# Altium PCB PCB1.PcbDoc
Units mil, origin at the board's own origin, x right, y up, seen from the top; angles counter-clockwise.
Board outline 3000.44 x 2100 mil, 4 copper layers (Top Layer, Int1 (GND), Int2 (GND), Bottom Layer), stack 53.912 mil thick; 42 components, 23 nets, 152 pads, 57 vias.
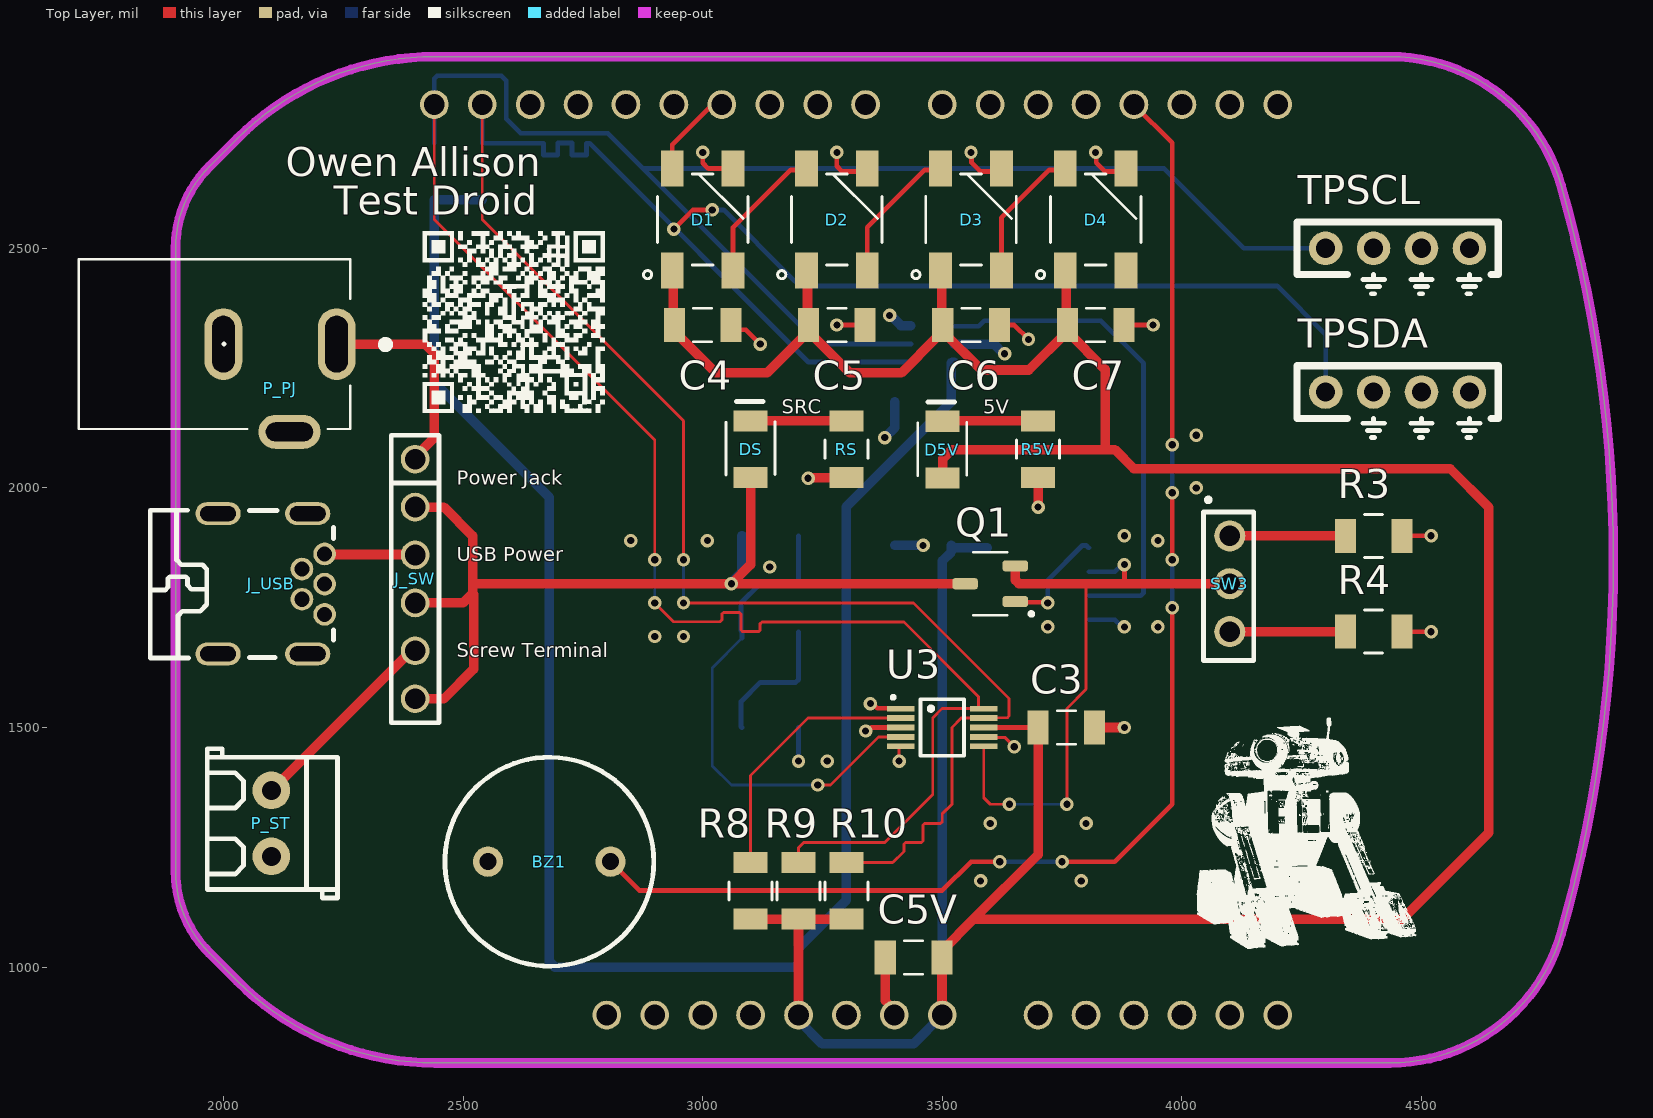
[diagram p0: Top Layer view]
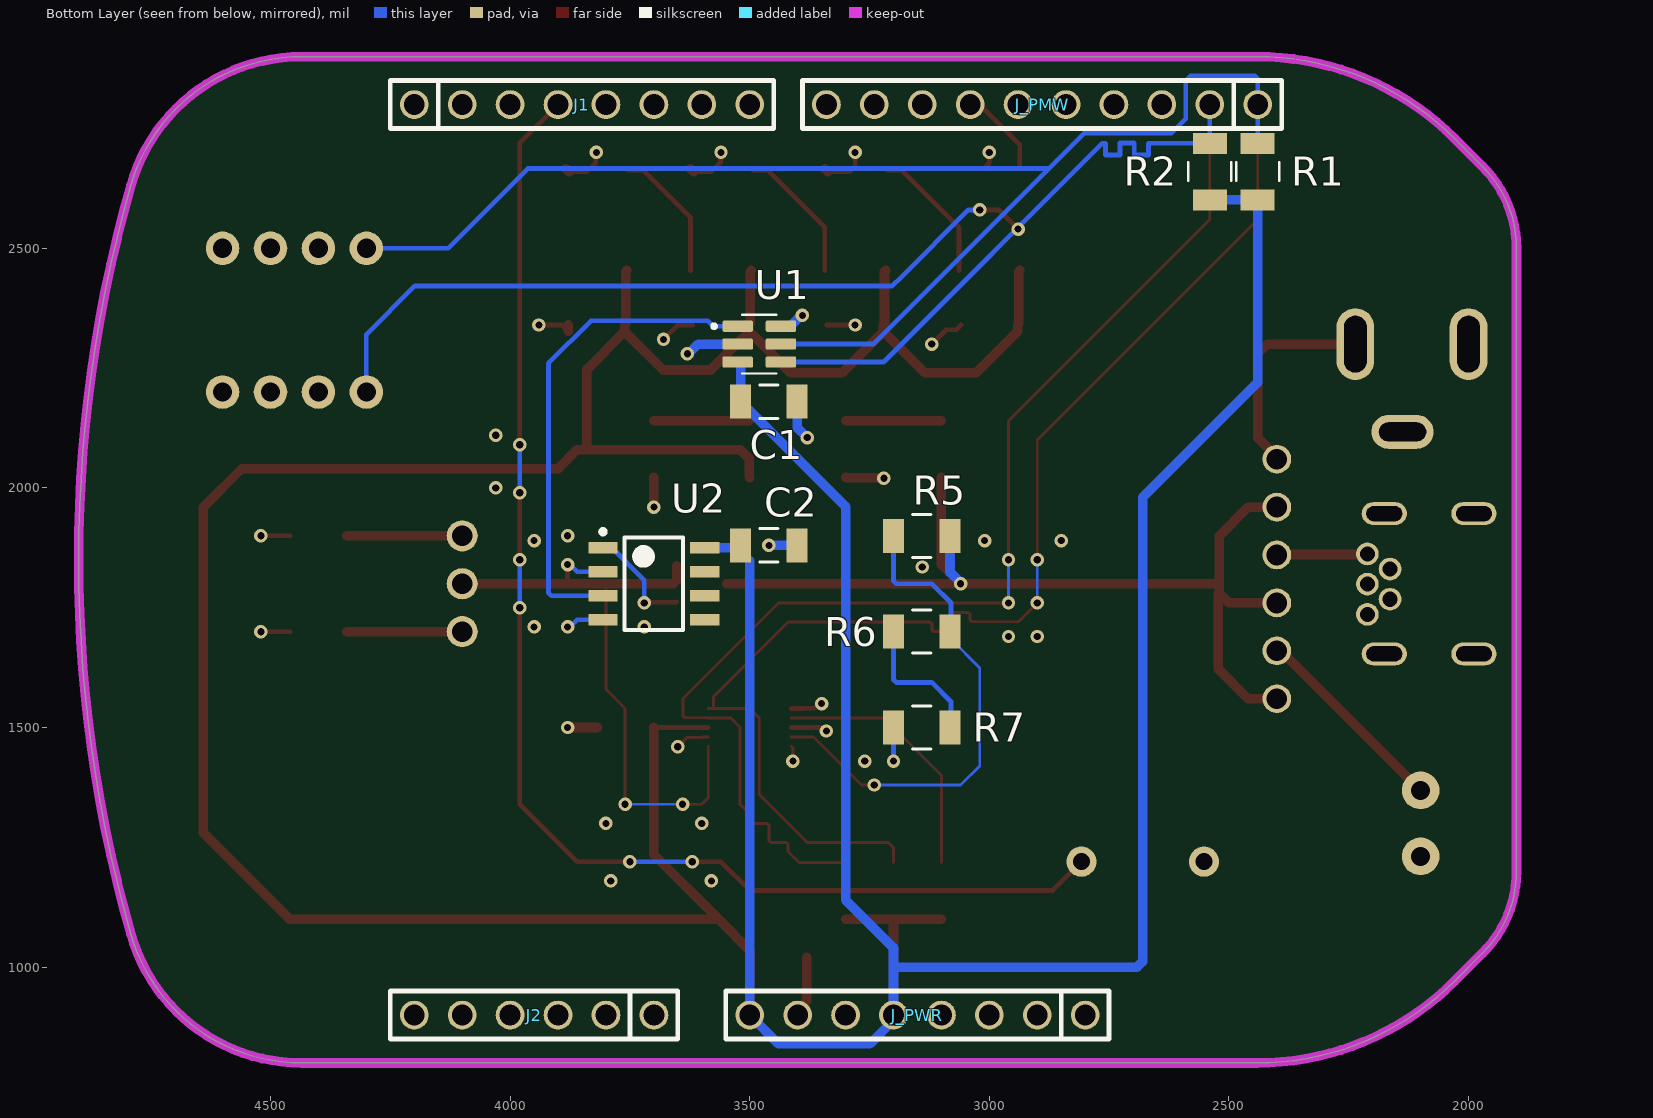
[diagram p1: Bottom Layer view, seen from below]
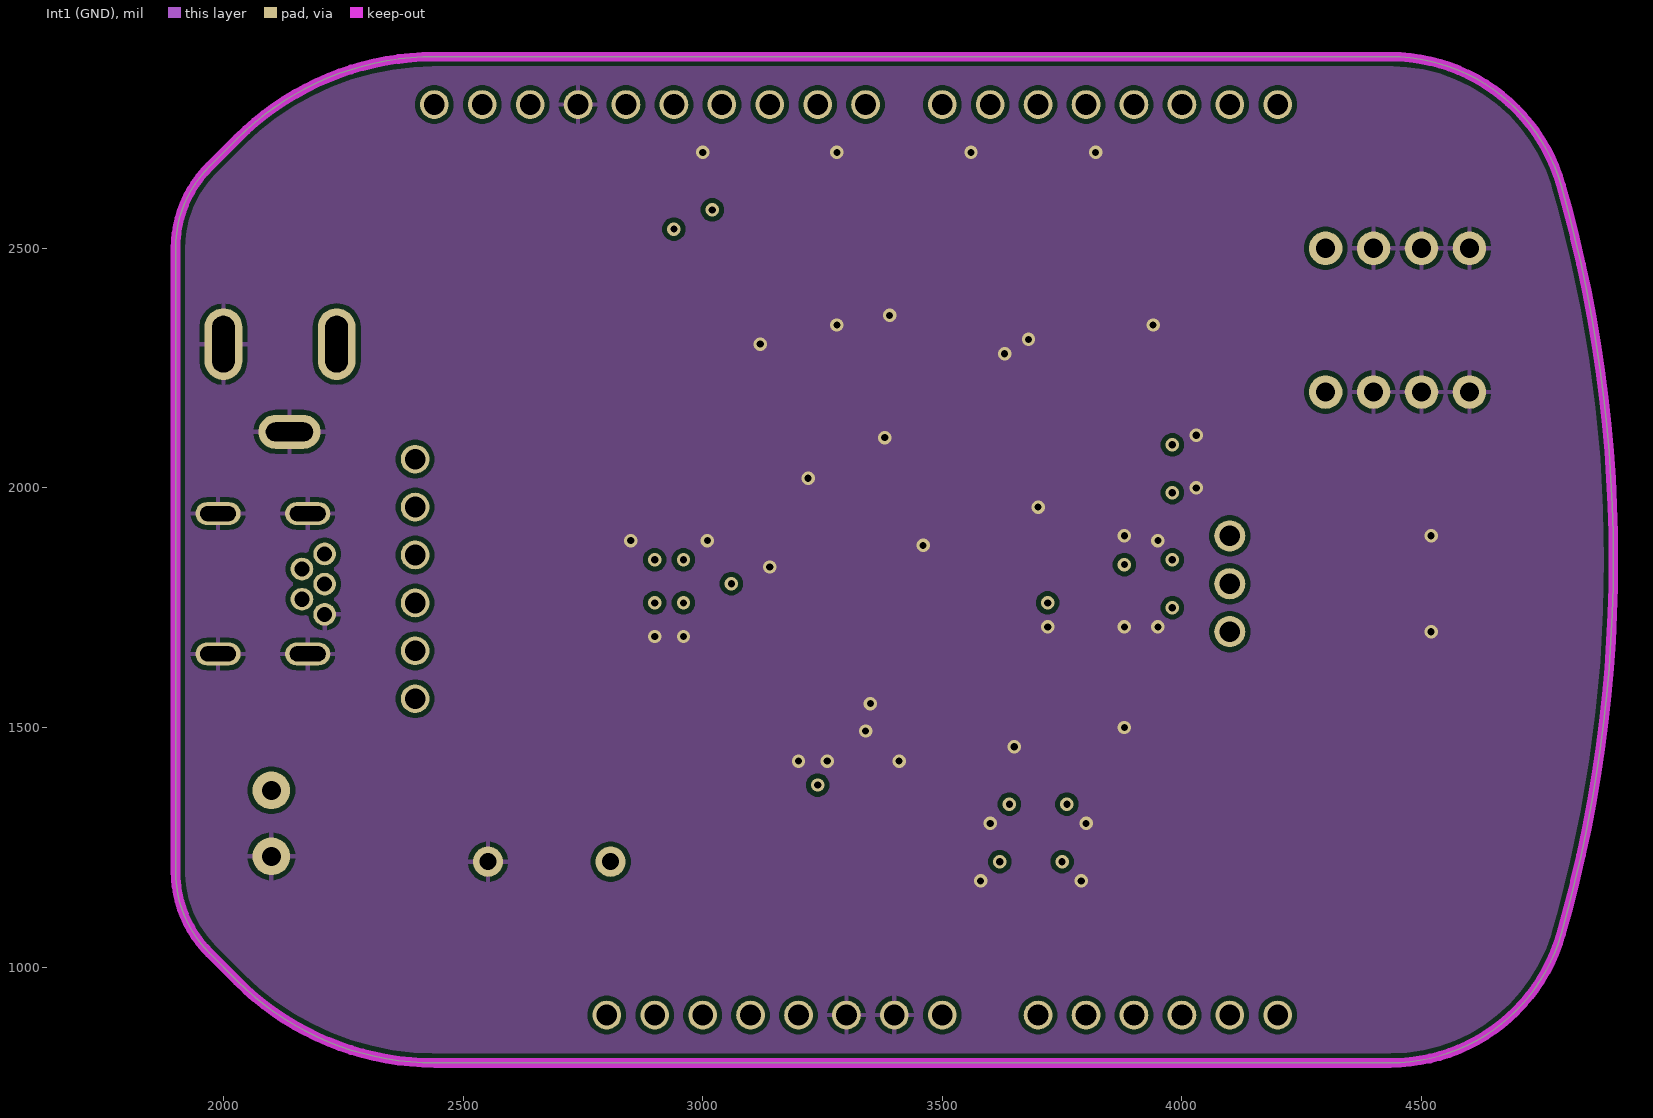
[diagram p2: Int1 (GND)]
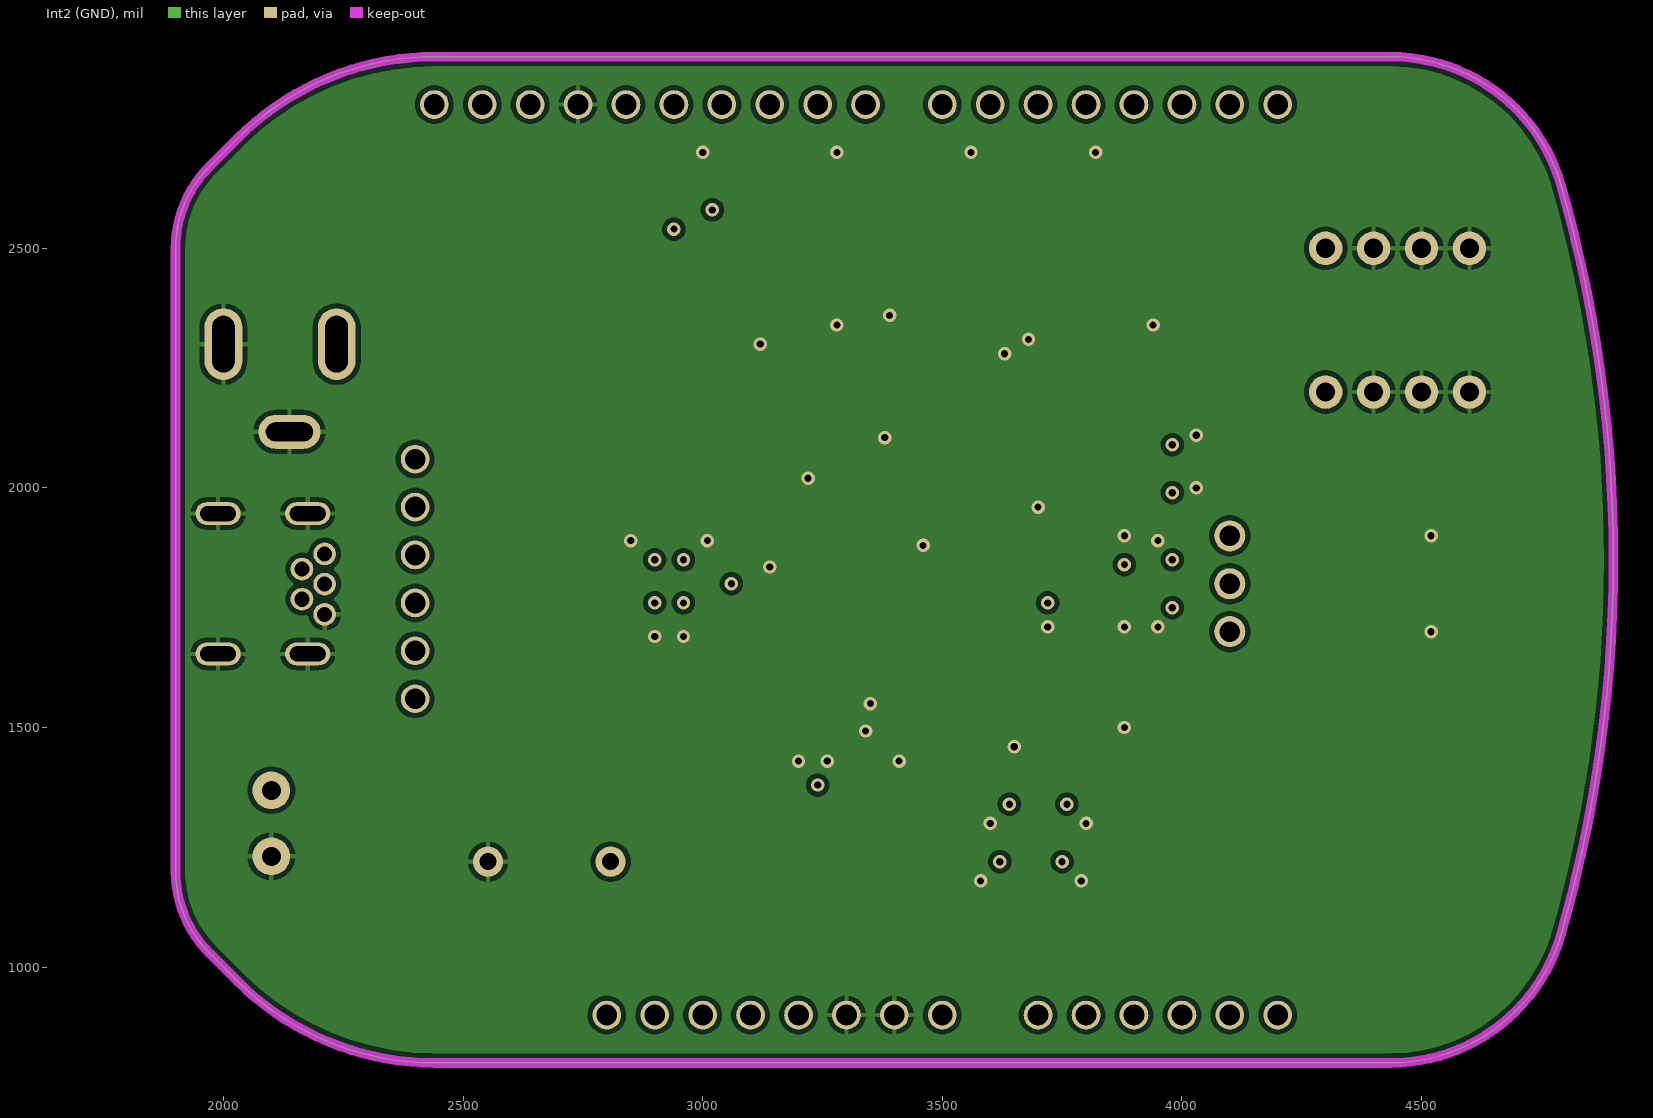
[diagram p3: Int2 (GND)]
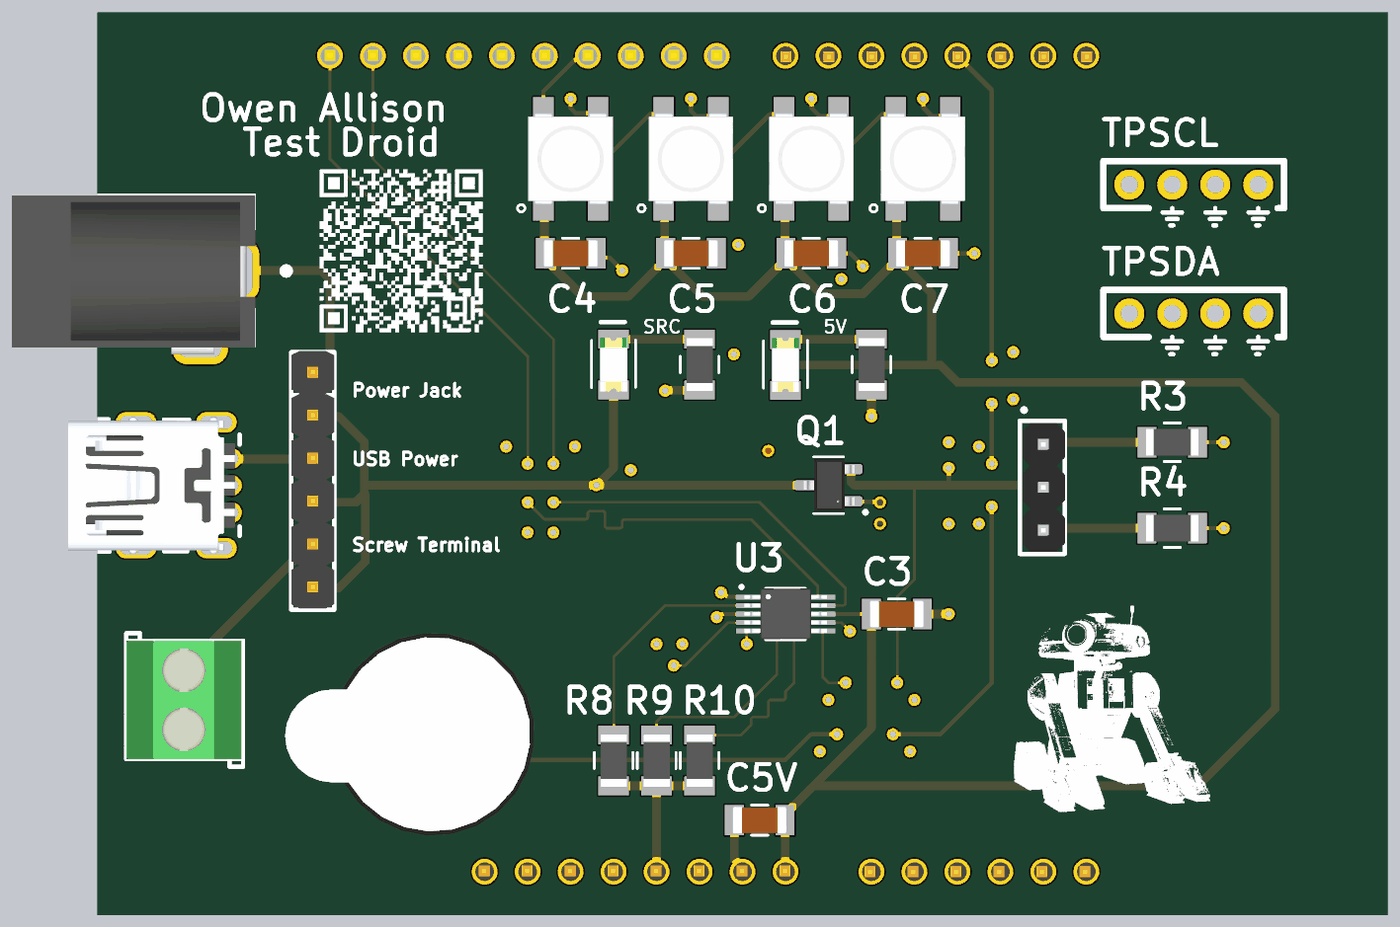
[diagram p4: 3D render of the assembled board from above, using the file's embedded part models]
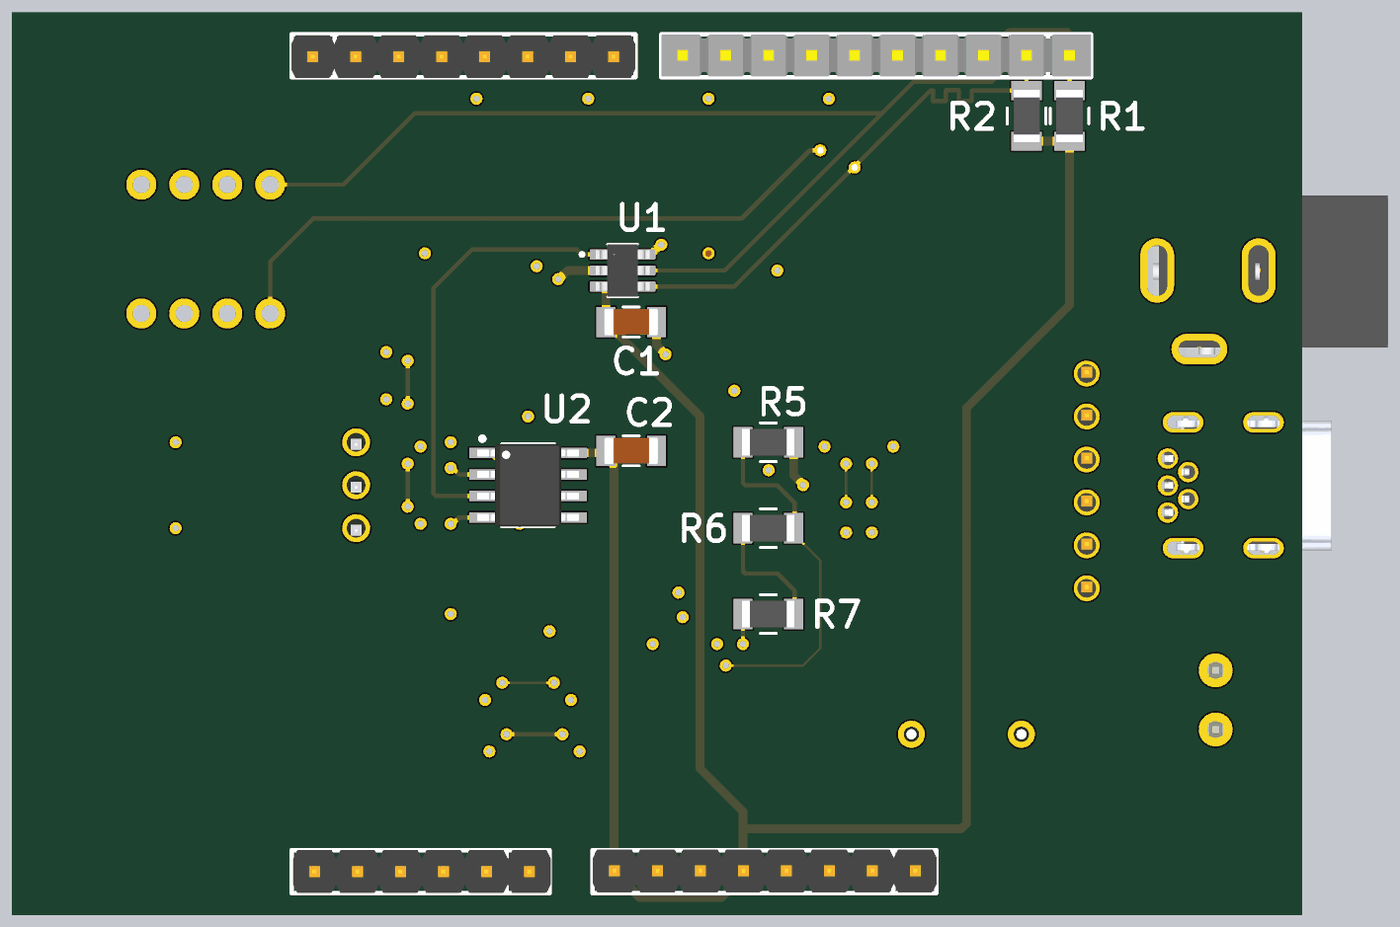
[diagram p5: 3D render of the assembled board from below, using the file's embedded part models]

## Layer stack, top to bottom
Top Solder: solder mask 1, SM-001, Dk 4
Top Layer: signal copper 1.378
Dielectric 1: prepreg 5.1, PP-017, Dk 4.3
Dielectric 2: prepreg 5.1, PP-017, Dk 4.3
Int1 (GND): signal copper 1.378
Dielectric 3: core 28, Core-039, Dk 4.8
Int2 (GND): signal copper 1.378
Dielectric 4: prepreg 5.1, PP-017, Dk 4.3
Dielectric 5: prepreg 5.1, PP-017, Dk 4.3
Bottom Layer: signal copper 1.378
Bottom Solder: solder mask 1, SM-001, Dk 4

## Board outline
1900,2500 1900,1200 ccw(c2141.42,1200) 1970.71,1029.29 2029.29,970.71 ccw(c2441.42,1382.84) 2441.42,800 4435.06,800 ccw(c4435.06,1170.46) 4791.34,1068.95 ccw(c2050.05,1850) 4791.34,2631.05 ccw(c4435.07,2529.55) 4435.06,2900 2441.42,2900 ccw(c2441.42,2317.16) 2029.29,2729.29 1970.71,2670.71 ccw(c2141.42,2500)

## Design rules (kind name [scope] priority, off if disabled: settings)
Clearance [All] p1: gap=10 ignorepadtopadclearanceinfootprint=FALSE
PlaneConnect [All] p1: planeconnectstyle=Direct reliefexpansion=20 reliefentries=4 reliefconductorwidth=10 reliefairgap=10
PolygonConnect [All] p1: thpad.connectstyle=Relief thpad.reliefconductorwidth=10 thpad.reliefentries=4 thpad.polygonreliefangle="90 Angle" thpad.airgapwidth=10 smdpad.connectstyle=Direct smdpad.reliefconductorwidth=10 smdpad.reliefentries=4 smdpad.polygonreliefangle="90 Angle" smdpad.airgapwidth=10 via.connectstyle=Direct via.reliefconductorwidth=10 via.reliefentries=4 via.polygonreliefangle="90 Angle" via.airgapwidth=10
RoutingVias [All] p1: holewidth=15 width=28 viastyle="Through Hole" minholewidth=15 minwidth=28 maxholewidth=30 maxwidth=50
SolderMaskExpansion [All] p1: expansion=4 istentingtop=FALSE
SupplyNets "Schematic Supply Nets_1" [InNet('+5')] p1: voltage=0.000
SupplyNets "Schematic Supply Nets" [InNet('GND')] p2: voltage=0.000
UnRoutedNet [All] p1: checkbadconnections=TRUE
Width [All] p1: maxlimit=20 minlimit=6 preferedwidth=10 midlayer1_maxwidth=10 midlayer2_maxwidth=10 minimp=50.000000 maximp=50.000000 favimp=50.000000
28 further rules are at their usual default settings.

## Components (designator, comment, footprint, x,y, rotation, side; value= is the part's Value field where it differs from the comment)
BZ1 "AT-1224-TWT-5V-2-R" "BUZZER- TH" 2680,1220 r90 top
C1 "10uF" 1206_Passive_Capacitor 3460,2180 r0 bottom
C2 "10uF" 1206_Passive_Capacitor 3460,1880 r0 bottom
C3 "10uF" 1206_Passive_Capacitor 3759,1500 r180 top
C4 "10uF" 1206_Passive_Capacitor 3000,2340 r0 top
C5 "10uF" 1206_Passive_Capacitor 3280,2340 r0 top
C5V "10uF" 1206_Passive_Capacitor 3440,1020 r0 top
C6 "10uF" 1206_Passive_Capacitor 3560,2340 r0 top
C7 "10uF" 1206_Passive_Capacitor 3820,2340 r0 top
D1 "IN-PI55QATPRPGPBPW" "SERIAL_LED - duplicate" 3000,2560 r90 top
D2 "IN-PI55QATPRPGPBPW" "SERIAL_LED - duplicate" 3280,2560 r90 top
D3 "IN-PI55QATPRPGPBPW" "SERIAL_LED - duplicate" 3560,2560 r90 top
D4 "IN-PI55QATPRPGPBPW" "SERIAL_LED - duplicate" 3820,2560 r90 top
D5V "Red" LED_1206 3500,2080 r90 top
DS "Red" LED_1206 3100,2081 r90 top
J1 "MALE 8PIN" 8_PIN_100MIL-Male 4200,2800 r180 bottom value=MALE
J2 "MALE" 6_PIN_100MIL-Male 3700,900 r0 bottom
J_PMW "MALE 10PIN" 10_PIN_100MIL-Male 2440,2800 r0 bottom value=MALE
J_PWR "MALE 8PIN" 8_PIN_100MIL-Male 2800,900 r0 bottom value=MALE
J_SW "MALE" 6_PIN_100MIL-Male 2400,2060 r270 top
J_USB "USB Mini" USB_MINI_B 2100,1800 r270 top value="USB mini B"
P_PJ "Power Jack" Power_Jack 2236.22,2300 r180 top value="CONN PWR JACK 2X5.5MM SOLDER"
P_ST "2P Screw Terminal Block" "P_Terminal block 3.5mm-pitch" 2100,1300 r270 top
Q1 "AO3400A" N-MOSFET 3600,1800 r180 top value="N channel"
R1 "4.7KOhm" 1206_Passive_Resitor 2440,2660 r270 bottom
R2 "4.7KOhm" 1206_Passive_Resitor 2540,2660 r270 bottom
R3 "1 Ohm" 1206_Passive_Resitor 4400,1900 r180 top value=1Ohm
R4 "10 Ohm" 1206_Passive_Resitor 4400,1700 r180 top
R5 "10k" 1206_Passive_Resitor 3141,1900 r180 bottom value=10KOhm
R5V "1k" 1206_Passive_Resitor 3700,2081 r90 top value="1K Ohm"
R6 "4.7KOhm" 1206_Passive_Resitor 3141,1700 r180 bottom
R7 "300 Ohm" 1206_Passive_Resitor 3141,1500 r180 bottom value=300Ohm
R8 "10k" 1206_Passive_Resitor 3100,1159 r270 top value=10KOhm
R9 "10k" 1206_Passive_Resitor 3200,1159 r270 top value=10KOhm
R10 "10k" 1206_Passive_Resitor 3300,1159 r270 top value=10KOhm
RS "1k" 1206_Passive_Resitor 3300,2081 r90 top value="1K Ohm"
SW3 "PREC003SAAN-RC" 3_PIN_100mil 4100,1900 r270 top value="CONN HEADER VERT 3POS 2.54MM"
TPSCL "10x Probe TP" TP10x_Probe 4450,2500 r0 top
TPSDA "10x Probe TP" TP10x_Probe 4450,2200 r0 top
U1 "DAC IC" MCP4725 3480,2300 r180 bottom
U2 "MCP6002T-I/SN" SOIC127P600X175-8N 3700,1800 r180 bottom
U3 "ADS1115IDGSR" ADC_ADS1115IDGSR 3500,1500 r0 top

## Footprints (in the part's own frame and the unit in brackets; to place one, negate y for a bottom-side part, rotate by r counter-clockwise, add the part's x,y. Pads: shape width x height; smd on the part's side, far side on the other; paste and mask are expansions set on the pad)
3_PIN_100mil [mm]
  round 1.65 hole 1.1: 1(0,0) 2(2.54,0) 3(5.08,0)
  silkscreen extent -2,-1.4 6.6,1.27, body extent -1.14,-1.27 6.48,1.27, height 8.38
6_PIN_100MIL-Male [mil]
  round 60 hole 43.31: 1(0,0) 2(100,0) 3(200,0) 4(300,0) 5(400,0) 6(500,0)
  silkscreen extent -50,-50 550,50, body extent -53,-50 547,50, height 337
8_PIN_100MIL-Male [mil]
  round 60 hole 43.31: 1(0,0) 2(100,0) 3(200,0) 4(300,0) 5(400,0) 6(500,0) 7(600,0) 8(700,0)
  silkscreen extent -50,-50 750,50, body extent -51,-52 749,48, height 337
10_PIN_100MIL-Male [mil]
  round 60 hole 43.31: 1(0,0) 2(100,0) 3(200,0) 4(300,0) 5(400,0) 6(500,0) 7(600,0) 8(700,0) 9(800,0) 10(900,0)
  silkscreen extent -50,-50 950,50, body extent -50,-50 950,48, height 330
1206_Passive_Capacitor [mil]
  rect 44x71 smd: 1(-59,0) 2(59,0)
  silkscreen extent -19,-35 19,35, body extent -63,-31 63,31, height 50
1206_Passive_Resitor [mil]
  rect 44x71 smd: 1(-59,0) 2(59,0)
  silkscreen extent -19,-45 19,45, body extent -61,-31 61,31, height 26
ADC_ADS1115IDGSR [mm] "*SOP50P490X110-10N"
  rect 1.45x0.3 smd mask+0.025: 1(-2.2,1)
  rect 1.47x0.3 smd mask+0.025: 2(-2.2,0.5) 3(-2.2,0) 4(-2.2,-0.5) 5(-2.2,-1) 6(2.2,-1) 7(2.2,-0.5) 8(2.2,0) 9(2.2,0.5) 10(2.2,1)
  silkscreen extent -2.68,-1.5 1.15,1.68, body extent -2.44,-1.49 2.46,1.51, height 1.1
"BUZZER- TH" [mm]
  round 1.6 hole 0.9: 1(0,3.25) 2(0,-3.25)
  silkscreen extent -5.54,-5.54 5.54,5.53, body extent -6,-6 6,8.75, height 9.05
LED_1206 [mil]
  rect 44x71 smd: 1(-59,0) 2(59,0)
  silkscreen extent -54,-51 99,51, body extent -63,-31 63,31, height 28
MCP4725 [mm]
  rrect25% 1.61x0.59 smd: 1(-1.145,0.95) 2(-1.145,0) 3(-1.145,-0.95) 4(1.145,-0.95) 5(1.145,0) 6(1.145,0.95)
  silkscreen extent -2.5,-1.56 0.9,1.56, body extent -1.6,-1.55 1.6,1.55, height 1.45
N-MOSFET [mm]
  rrect50% 1.35x0.59 smd: 1(-1.33,0.95) 2(-1.33,-0.95) 3(1.33,0)
  silkscreen extent -2.28,-1.68 0.89,1.7, body extent -1.55,-1.55 1.45,1.55, height 1.25
"P_Terminal block 3.5mm-pitch" [mm]
  round 2 hole 1: 1(-1.75,0) 2(1.75,0)
  silkscreen extent -3.95,-3.4 3.95,3.5, body extent -3.5,-3.4 3.5,3.4, height 8.4
Power_Jack [mm]
  oval 2x3.8 hole 1.2 slot 3 at 90 deg: 1(0,0) 2(6,0)
  oval 3.3x1.8 hole 1 slot 2.5 at 0 deg: 3(2.5,4.65)
  silkscreen extent -2.79,-4.5 13.68,4.5, body extent -0.76,-4.45 13.64,4.95, height 11.49
"SERIAL_LED - duplicate" [mil] "Footprint for serial LED"
  rect 74.8x47.5 smd: 1(-106.3,63.5) 2(-106.3,-63.5) 3(106.3,-63.5) 4(106.3,63.5)
  silkscreen extent -124,-94 95,124, body extent -106,-98 106,98, height 63
SOIC127P600X175-8N [mm] "SOIC, 8-Leads, Body 4.90x3.90mm, Pitch 1.27mm, IPC Medium Density"
  rect 1.55x0.6 smd: 1(-2.7,1.905) 2(-2.7,0.635) 3(-2.7,-0.635) 4(-2.7,-1.905) 5(2.7,-1.905) 6(2.7,-0.635) 7(2.7,0.635) 8(2.7,1.905)
  silkscreen extent -2.83,-2.45 1.55,2.88, body extent -3,-2.45 3,2.45, height 1.75
TP10x_Probe [mil] "Small Probs footprint"
  round 70 hole 40: 1(-150,0) 2(-50,0) 2(50,0) 2(150,0)
  silkscreen extent -210,-95 210,55
USB_MINI_B [mm]
  round 1.2 hole 0.8: 1(-1.58,2.826) 2(-0.78,1.622) 3(0.02,2.826) 4(0.82,1.622) 5(1.62,2.826)
  oval 1.2x2.4 hole 0.8 slot 1.9 at 90 deg: 6(-3.72,1.924) 7(3.72,1.924) 8(-3.72,-2.826) 9(3.72,-2.826)
  silkscreen extent -3.89,-6.42 3.93,3.3, body extent -4.04,-6.83 4.06,3.02, height 3.98

## Part data
BZ1: library part BUZZER_1, "Buzzers Transducer, Externally Driven Electromechanical/Magnetic 5 V 40mA 2.4kHz 87dB @ 5V, 10cm Through Hole PC Pins", Datasheet=https://www.puiaudio.com/media/SpecSheet/AT-1224-TWT-5V-2-R.pdf, MFR Part #=AT-1224-TWT-5V-2-R
C1 C2 C3 C4 C5 C5V C6 C7: library part C_10uF_1206, "10uF ±10% 50V X5R 1206 Multilayer Ceramic Capacitors MLCC - SMD/SMT RoHS", LCSC Part#=C13585, MFR Part #=CL31A106KBHNNNE, Datasheet=https://datasheet.lcsc.com/lcsc/1810221112_Samsung-Electro-Mechanics-CL31A106KBHNNNE_C13585.pdf, Type=Basic
D1 D2 D3 D4: library part LED_Smart, "LIGHT EMITTING DIODES (LED) RGB 620~630NM RED, 520~530NM GREEN, 465~475NM BLUE 600MCD@16MARED,1200MCD@16MAGREEN,300MCD@16MABLUE TOP VIEW SMD-4 ROHS", LCSC Part#=C2843785, Manufacturer=XINGLIGHT, MFR Part #=XL-5050RGBC-WS2812B, Datasheet=https://datasheet.lcsc.com/lcsc/2301111130_XINGLIGHT-XL-5050RGBC-WS2812B_C2843785.pdf
D5V DS: library part LED_RED_1206, "Red 621~631nm 1206 Light Emitting Diodes (LED) RoHS", LCSC Part#=C93133, MFR Part #=15-21/R6C-FQ1R1B/2T, Datasheet=https://datasheet.lcsc.com/szlcsc/1811151241_Everlight-Elec-15-21-R6C-FQ1R1B-2T_C93133.pdf, Type=Extended
J1 J_PWR: library part JM_8_PIN_MALE, "Pin Header 8 1 right-angle，180degrees 2.54mm Through Hole,P=2.54mm Pin Header & Female Header RoHS", LCSC Part#=C492407, Datasheet=https://datasheet.lcsc.com/szlcsc/2003191006_XFCN-PZ254V-11-08P_C492407.pdf, Type=Extended
J2 J_SW: library part JM_6_PIN_MALE, "Male header- 6 pin 1 row- through Hole", LCSC Part#=C37208, Datasheet=https://datasheet.lcsc.com/szlcsc/1810312320_BOOMELE-Boom-Precision-Elec-C37208_C37208.pdf, Type=Extended
J_PMW: library part JM_10_PIN_MALE, "Pin Header 10 1 Straight ，180degrees 2.54mm Through Hole,P=2.54mm Pin Header & Female Header RoHS", LCSC Part#=C124372, Datasheet=https://datasheet.lcsc.com/szlcsc/1810241611_Ckmtw-Shenzhen-Cankemeng-C124372_C124372.pdf, Type=Extended
J_USB: library part J_USB_B_Mini, "Through Hole USB Connectors RoHS", LCSC Part#=C46398, MFR Part #=920-462A2021D10102, Datasheet=https://datasheet.lcsc.com/szlcsc/2103081233_Jing-Extension-of-the-Electronic-Co-920-462A2021D10102_C46398.pdf, Type=Extended
P_PJ: library part "P_Power Jack", "Power Barrel Connector Jack 2.10mm ID (0.083\"), 5.50mm OD (0.217\") Through Hole, Right Angle", LCSC Part#=C136744, MFR Part #=PJ-102A, Digikey Link=https://www.digikey.com/product-detail/en/PJ-102A/CP-102A-ND/275425/?itemSeq=304982367, Type=Extended
P_ST: library part "P_Terminal block", "Green Straight pin 3.5mm  pitch; P=3.5mm  Screw terminal ROHS", LCSC Part#=C474892, Manufacturer="Cixi Kefa Elec", MFR Part #=KF350-3.5-2P, Datasheet=https://datasheet.lcsc.com/lcsc/2001160007_Cixi-Kefa-Elec-KF350-3-5-2P_C474892.pdf
Q1: library part Q_Nch_MOSFET, "MOSFET N Trench 30V 5.7A 1.5V @ 250uA 26.5 m? @ 5.7A,10V SOT-23-3L RoHS", LCSC Part#=C20917, Datasheet=https://datasheet.lcsc.com/szlcsc/Alpha-Omega-Semicon-AOS-AO3400A_C20917.pdf, MFR Part #=AO3400A, Type=Basic
R1 R2 R6: library part R_4.7k_1206, "4.7kΩ ±1% 0.25W ±100ppm/℃ 1206 Chip Resistor - Surface Mount RoHS", LCSC Part#=C17936, MFR Part #=1206W4F4701T5E, Datasheet=https://datasheet.lcsc.com/lcsc/1810301414_UNI-ROYAL-Uniroyal-Elec-1206W4F4701T5E_C17936.pdf, Type=Basic
R3: library part R_1Ohm_1206, "1Ω ±5% 0.25W ±400ppm/℃ 1206 Chip Resistor - Surface Mount RoHS", LCSC Part#=C1409, MFR Part #=1206W4J010JT5E, Datasheet=https://datasheet.lcsc.com/lcsc/1810301410_UNI-ROYAL-Uniroyal-Elec-1206W4J010JT5E_C1409.pdf, Type=Extended
R4: library part R_10Ohm_1206, "CHIP RESISTOR - SURFACE MOUNT 0.1OHMS ±1% 1/4W 1206 ROHS", LCSC Part#=C17903, MFR Part #=1206W4F100JT5E, Datasheet=https://datasheet.lcsc.com/szlcsc/Uniroyal-Elec-1206W4F100JT5E_C17903.pdf, Type=Basic
R5 R8 R9 R10: library part R_10KOhm_1206, "10 kOhms ±5% 0.25W, 1/4W Chip Resistor 1206 (3216 Metric) Automotive AEC-Q200 Thick Film", LCSC Part#=C17902, MFR Part #=RMCF1206FT10K0, Digikey Link=https://www.digikey.com/en/products/detail/stackpole-electronics-inc/RMCF1206FT10K0/1759669, Type=Basic
R5V RS: library part R_1K_1206, "CHIP RESISTOR - SURFACE MOUNT 1KOHMS ±1% 1/4W 1206 ROHS", LCSC Part#=C4410, MFR Part #=RNCP1206FTD1K00CT, Digikey Link=https://www.digikey.com/product-detail/en/RNCP1206FTD1K00/RNCP1206FTD1K00CT-ND/2240675/?itemSeq=304982373, Type=Basic
R7: library part R_300Ohm_1206, "CHIP RESISTOR - SURFACE MOUNT 300OHMS ±1% 1/4W 1206 ROHS", LCSC Part#=C17887, MFR Part #=1206W4F3000T5E, Datasheet=https://datasheet.lcsc.com/szlcsc/Uniroyal-Elec-1206W4F3000T5E_C17887.pdf, Type=Basic
SW3: library part SW_3Pin_100mil_Switch, "Connector Header Through Hole 3 position 0.100\" (2.54mm)", LCSC Part#=C49257, Digikey Link=https://www.digikey.com/product-detail/en/PREC003SAAN-RC/S1012EC-03-ND/2774851/?itemSeq=304982371, MFR Part #=PREC003SAAN-RC, Type=Extended
TPSCL TPSDA: library part TP_10x_Probe, "Test Point 300 mil centers"
U1: library part U_MCP4725A0T-E/CH, "IC DAC 12BIT V-OUT SOT23-6", LCSC Part#=C144198, MFR Part #=MCP4725A0T-E/CH, Datasheet=https://ww1.microchip.com/downloads/en/DeviceDoc/22039d.pdf, Type=Extended
U2: library part U_MCP6002T-I/SN, "0.6 V/us 2 1MHz 1.8V ~ 6V 100μA General Purpose SOIC-8_150mil  Operational Amplifier ROHS", LCSC Part#=C7377, Mfr=Microchip, Datasheet=https://ww1.microchip.com/downloads/en/DeviceDoc/MCP6001-1R-1U-2-4-1-MHz-Low-Power-Op-Amp-DS20001733L.pdf, MFR Part #=MCP6002T-I/SN, Type=Basic
U3: library part U_ADC_ADS1115IDGSR, "16-Bit ADC with Integrated MUX, PGA, Comparator, Oscillator, and Reference 10-VSSOP -40 to 125", LCSC Part#=C37593, Package="MSOP-10 Texas Instruments", Digikey Link=https://www.digikey.com/product-detail/en/texas-instruments/ADS1115IDGSR/296-38849-1-ND/5142969?utm_source=snapeda&utm_medium=aggregator&utm_campaign=symbol, MFR Part #=ADS1115IDGSR, SnapEDA_Link=https://www.snapeda.com/parts/ADS1115IDGSR/Texas%20Instruments/view-part/?ref=snap, Type=Extended

## Via types
v1: diameter 28, hole 15, Top Layer to Bottom Layer, 57 vias

## Nets (pads, with @x,y where several pads share a name; then routed paths per layer and width w, separated by ;. In a path a pad name is that pad's centre, name@x,y a point inside that pad or via, vN(x,y) a via of type N, cw(c..) or ccw(c..) an arc to the next point about the centre after c; other vN are vias at no path point)
+5: C1.2 C2.2 C3.2 C4.1 C5.1 C5V.2 C6.1 C7.1 D1.1 D2.1 D3.1 D4.1 D5V.1 J_PWR.5 J_PWR.8 R1.2 R2.2 R8.2 R9.2 R10.2 U1.3 U2.8 U3.8 | length 11323
  Top Layer w10: U3.8 C3.2
  Top Layer w20: D1.1 2938.75,2451.45 2938.75,2342.25 C4.1 2941,2326.5 3027.5,2240 3134.5,2240 C5.1@3221,2326.5 ; R8.2 R9.2 ; J_PWR.5 R9.2 ; D2.1 3218.75,2451.45 3218.75,2342.25 C5.1 C5.1@3221,2326.5 ; R10.2 R9.2 ; D3.1 3498.75,2451.45 3498.75,2342.25 C6.1 C6.1@3501,2326.5 ; C5V.2 C5V.2@3499.5,1019.5 ; J_PWR.8 3499.5,900.5 C5V.2@3499.5,1019.5 ; D5V.1 3501.28,2022.28 3501.28,2061.28 3520,2080 3840,2080 ; C3.2 3700,1234.5 3565.5,1100 ; D4.1 3758.75,2451.45 3758.75,2342.25 C7.1 C7.1@3761,2326.5 ; C5.1@3221,2326.5 3307.5,2240 3414.5,2240 3489,2314.5 C6.1@3501,2326.5 ; C5V.2@3499.5,1019.5 3499.5,1034 3565.5,1100 ; C6.1@3501,2326.5 3581.5,2246 3680.5,2246 C7.1@3761,2326.5 ; 3565.5,1100 4460,1100 4640,1280 4640,1960 4560,2040 3900,2040 3860,2080 3840,2080 ; C7.1@3761,2326.5 3840,2247.5 3840,2080
  Bottom Layer w20: R2.2 R1.2 2440,2220 2680,1980 2680,1011.72 2691.72,1000 3200,1000 ; U1.3 3520.61,2262.6 3519,2260.98 C1.2 3300,1961 3300,1140 3200,1040 3200,1000 ; U2.8 3524,1875 C2.2 3519,1866.5 3500,1847.5 J_PWR.8 3440,840 3249.18,840 3200,889.18 J_PWR.5 3200,1000
D3: BZ1.2 J1.4 | length 2764.6
  Top Layer w10: BZ1.2 2867.95,1160 3500,1160 3560,1220 v1(3620,1220) ; v1(3750,1220) 3860,1220 3980,1340 v1(3980,1750) ; J1.4 3980,2720 v1(3980,2090) ; v1(3980,1850) v1(3980,1990)
  Bottom Layer w10: v1(3620,1220) v1(3750,1220) ; v1(3980,1750) v1(3980,1850) ; v1(3980,1990) v1(3980,2090)
D11: D1.4 J_PMW.7 | length 188.3
  Top Layer w10: D1.4 2936.5,2716.5 3010.43,2790.43 3030.43,2790.43 J_PMW.7
DAC_out: U1.1 U2.3 | length 1031.9
  Bottom Layer w10: U1.1 3576.09,2337.4 3587.69,2349 3831,2349 3920,2260 3920,1780.86 3914.14,1775 U2.3
GND: BZ1.1 C1.1 C2.1 C3.1 C4.2 C5.2 C5V.1 C6.2 C7.2 D1.3 D2.3 D3.3 D4.3 J_PMW.4 J_PWR.6 J_PWR.7 J_USB.5 J_USB.6 J_USB.7 J_USB.8 J_USB.9 P_PJ.2 P_PJ.3 P_ST.2 R3.1 R4.1 R5V.1 R7.1 RS.1 TPSCL.2 TPSDA.2 U1.2 U1.6 U2.4 U3.1 U3.3 U3.5 U3.7 | length 1829.7
  Top Layer w6: v1(3410,1430) 3410,1457.72 3412.91,1460.63 U3.5 ; U3.7 3599.69,1480.32 3600.46,1479.54 3630.46,1479.54 v1(3650,1460)
  Top Layer w10: v1(3000,2700) 3000,2678.01 3011.72,2666.3 D1.3 ; C4.2 3069.14,2329.86 3090.14,2329.86 v1(3120,2300) ; v1(3280,2340) C5.2 ; v1(3280,2700) 3280,2671.72 3291.72,2660 D2.3@3337.2,2660 ; v1(3340,1492.68) 3344.87,1492.68 3352.19,1500 U3.3 ; v1(3350,1550) 3354.87,1550 3364.6,1540.28 3389.84,1540.28 3390.75,1539.37 U3.1 ; v1@3561.11,2698.89 3561.11,2678.89 3580,2660 D3.3@3617.2,2660 ; C6.2 3619.14,2339.86 3650.14,2339.86 v1(3680,2310) ; v1@3821.11,2698.89 3821.11,2678.89 3840,2660 D4.3@3877.2,2660 ; C7.2@3879,2326.5 3892.5,2340 v1(3940,2340) ; R4.1 v1(4520,1700) ; R3.1 v1(4520,1900)
  Top Layer w20: v1(3220,2020) 3221,2021 3299,2021 RS.1 ; D2.3@3337.2,2660 D2.3 ; C5V.1 3381,929.82 3400,910.82 J_PWR.7 ; v1(3560,2700) v1@3561.11,2698.89 ; D3.3@3617.2,2660 D3.3 ; v1(3700,1960) R5V.1 ; C3.1 v1(3880,1500) ; v1(3820,2700) v1@3821.11,2698.89 ; D4.3@3877.2,2660 D4.3 ; C7.2@3879,2326.5 C7.2
  Bottom Layer w10: v1(3200,1430) R7.1 ; U2.4 3860.13,1725 3875.13,1710 v1(3880,1710)
  Bottom Layer w20: v1(3380,2105) 3401,2126 C1.1 ; v1(3390,2360) 3391.53,2358.47 3393.77,2358.47 3413.54,2338.7 U1.6@3433.62,2338.7 ; C2.1 v1(3460,1880) ; U1.2 3607.84,2300 3627.84,2280 v1(3630,2280)
  other v1: 3580,1180 3790,1180 3600,1300 3800,1300 3260,1430 2900,1690 2960,1690 3720,1710 3950,1710 3140,1835 2850,1890 3010,1890 3950,1890 3880,1900 4030,2000 4030,2110
NetD1_2: D1.2 D2.4 | length 293.7
  Top Layer w10: D1.2 3063.5,2543.5 3183.61,2663.61 3213.81,2663.61 D2.4
NetD2_2: D2.2 D3.4 | length 293.7
  Top Layer w10: D2.2 3343.5,2543.5 3463.61,2663.61 3493.81,2663.61 D3.4
NetD3_2: D3.2 D4.4 | length 285.4
  Top Layer w10: D3.2 3623.5,2563.5 3723.61,2663.61 3753.81,2663.61 D4.4
NetD5V_2: D5V.2 R5V.2 | length 199
  Top Layer w20: D5V.2@3501,2140 R5V.2
NetDS_2: DS.2 RS.2 | length 200
  Top Layer w20: DS.2 RS.2
NetQ1_1: Q1.1 U2.1 | length 234.6
  Top Layer w10: Q1.1 3653.66,1761.3 3718.7,1761.3 v1(3720,1760)
  Bottom Layer w10: v1(3720,1760) 3720,1807.4 3792.6,1880 3800,1880 3805,1875 U2.1
NetR3_2: R3.2 SW3.1 | length 241
  Top Layer w20: SW3.1 R3.2
NetR4_2: R4.2 SW3.3 | length 241
  Top Layer w20: SW3.3 R4.2
NetR6_1: R6.1 R7.2 | length 294
  Bottom Layer w10: R7.2 3080,1502 3080,1554.14 3120,1594.14 3194.14,1594.14 3200,1600 R6.1
NetR8_1: R8.1 U3.2 | length 545
  Top Layer w6: R8.1 3100,1400 3219.69,1519.68 U3.2
S_PJ: J_SW.1 P_PJ.1 | length 448.6
  Top Layer w20: P_PJ.1 2420,2300 2440,2280 2440,2104.85 2400,2064.85 J_SW.1
S_ST: J_SW.5 P_ST.1 | length 420.6
  Top Layer w20: P_ST.1 2391.1,1660 J_SW.5
S_USB: J_SW.3 J_USB.1 | length 189.7
  Top Layer w20: J_USB.1 2212.36,1861.1 2398.9,1861.1 J_SW.3
SCL: J_PMW.1 R1.1 R9.1 TPSCL.1 U1.5 U3.10 | length 5612.7
  Top Layer w6: J_PMW.1@2440,2786.47 2440,2560 2900,2100 v1(2900,1850) ; v1(2900,1760) 2939.36,1720.64 3036.13,1720.64 3038.24,1722.75 3040,1724.51 3040,1736.49 3043.51,1740 3076.49,1740 3080,1736.49 3080,1703.51 3083.51,1700 3116.49,1700 3120,1703.51 3120,1716.49 3123.51,1720 3420,1720 3575.22,1564.78 3575.22,1542.28 3578.13,1539.37 U3.10 ; R9.1 3200,1249 3211,1260 3380,1260 3480,1360 3480,1520 3499.37,1539.37 U3.10@3575.22,1539.37
  Top Layer w10: J_PMW.1@2440,2786.47 J_PMW.1
  Bottom Layer w6: v1(2900,1760) v1(2900,1850)
  Bottom Layer w10: R1.1 J_PMW.1 2440,2854.14 2445.86,2860 2580,2860 2590,2850 2590,2770 2620,2740 2802.29,2740 2876,2666.3 ; U1.5 3242.29,2300 2876,2666.3 ; TPSCL.1 4129.48,2500 3963.18,2666.3 2876,2666.3
SDA: J_PMW.2 R2.1 R10.1 TPSDA.1 U1.4 U3.9 | length 5458.7
  Top Layer w6: J_PMW.2 2540,2560 2960,2140 v1(2960,1850) ; v1(2960,1760) 3440,1760 3639.39,1560.61 3639.39,1523.98 3635.88,1520.46 3587.39,1520.46 U3.9 3539.69,1519.68 3520,1500 3520,1340 3500,1320 3500,1303.51 3496.49,1300 3463.51,1300 3460,1296.49 3460,1263.51 3456.49,1260 3423.51,1260 3420,1256.49 3420,1241.51 3396.49,1218 R10.1
  Top Layer w10: v1(2940,2540) 2980,2580 v1(3020,2580)
  Bottom Layer w6: v1(2960,1760) v1(2960,1850)
  Bottom Layer w10: J_PMW.2@2540,2780 R2.1 2632.63,2719 2667.63,2719 2667.63,2694.68 2697.63,2694.68 2697.63,2720 2727.63,2720 2727.63,2694.68 2757.63,2694.68 2757.63,2719 2764.17,2719 2764.47,2719 3220.87,2262.6 U1.4 ; v1(3020,2580) 3043.93,2580 3183.93,2440 3202.47,2421.46 4198.54,2421.46 4300,2320 TPSDA.1
Source: DS.1 J_SW.2 J_SW.4 J_SW.6 Q1.3 R5.2 | length 2072.1
  Top Layer w20: J_SW.6 2460,1560 2522,1622 2522,1701 2522,1778 2520,1780 2520,1800 ; J_SW.4 2500,1760 2518,1778 ; J_SW.2 2460,1960 2520,1900 2520,1800 ; DS.1 3100,1840 v1(3060,1800) ; Q1.3 v1(3060,1800) ; 2520,1800 v1(3060,1800)
  Bottom Layer w20: v1(3060,1800) 3060,1802.16 3082,1824.16 R5.2
V_current: Q1.2 SW3.2 U2.2 U3.6 | length 1363.2
  Top Layer w6: U3.6 3586.61,1353.39 3600,1340 v1(3640,1340) ; v1(3760,1340) 3760,1540 3800,1580 3800,1800
  Top Layer w10: 3880,1800 v1(3880,1840)
  Top Layer w20: Q1.2 3652.36,1807.64 3660,1800 3800,1800 3880,1800 SW3.2
  Bottom Layer w6: v1(3640,1340) v1(3760,1340)
  Bottom Layer w10: U2.2 3860.13,1825 3875.13,1840 v1(3880,1840)
V_VRM: R5.1 R6.2 U3.4 | length 1051.2
  Top Layer w6: v1(3240,1380) 3266.7,1380 3366.7,1480 3413.07,1480 U3.4
  Bottom Layer w6: R6.2@3082,1686.5 3020,1624.5 3020,1420 3060,1380 v1(3240,1380)
  Bottom Layer w10: R6.2@3082,1686.5 R6.2 3080,1702 3080,1760 3120,1800 3194.14,1800 3200,1805.86 R5.1
pads on no net: D4.2 J1.1 J1.2 J1.3 J1.5 J1.6 J1.7 J1.8 J2.1 J2.2 J2.3 J2.4 J2.5 J2.6 J_PMW.3 J_PMW.5 J_PMW.6 J_PMW.8 J_PMW.9 J_PMW.10 J_PWR.1 J_PWR.2 J_PWR.3 J_PWR.4 J_USB.2 J_USB.3 J_USB.4 U2.5 U2.6 U2.7

## Polygon pours and split planes (outlines as drawn)
GND on Int1 (GND) "GND_L02_P001" (solid, pour order 1): 1900,2500 1900,1200 ccw(c2141.42,1200) 1970.71,1029.29 2029.29,970.71 ccw(c2441.42,1382.84) 2441.42,800 4435.06,800 ccw(c4435.06,1170.46) 4791.34,1068.95 ccw(c2050.05,1850) 4791.34,2631.05 ccw(c4435.07,2529.55) 4435.06,2900 2441.42,2900 ccw(c2441.42,2317.16) 2029.29,2729.29 1970.71,2670.71 ccw(c2141.42,2500)
GND on Int2 (GND) "GND_L03_P002" (solid, pour order 2): 1900,2500 1900,1200 ccw(c2141.42,1200) 1970.71,1029.29 2029.29,970.71 ccw(c2441.42,1382.84) 2441.42,800 4435.06,800 ccw(c4435.06,1170.46) 4791.34,1068.95 ccw(c2050.05,1850) 4791.34,2631.05 ccw(c4435.07,2529.55) 4435.06,2900 2441.42,2900 ccw(c2441.42,2317.16) 2029.29,2729.29 1970.71,2670.71 ccw(c2141.42,2500)

## Keep-outs
Keep-Out Layer:
  the board outline again, w20

## Silkscreen, mask and mechanical layers (free items; w line width, h text height)
Top Overlay:
  drawing of 846 lines, arcs and shapes, not listed
  text "Owen Allison" at 2130,2650 h60
  text "Test Droid" at 2230,2570 h60
  text "SRC" at 3165,2155 h30
  text "5V" at 3585,2155 h30
  text "Power Jack" at 2487,2007 h30
  text "USB Power" at 2487,1847 h30
  text "Screw Terminal" at 2487,1647 h30